# Altium PCB HM-13 - 副本.PcbDoc
Units mil, origin at the board's own origin, x right, y up, seen from the top; angles counter-clockwise.
Board outline 6000 x 4000 mil, 2 copper layers (Top Layer, Bottom Layer); 12 components, 8 nets, 41 pads, 26 vias.
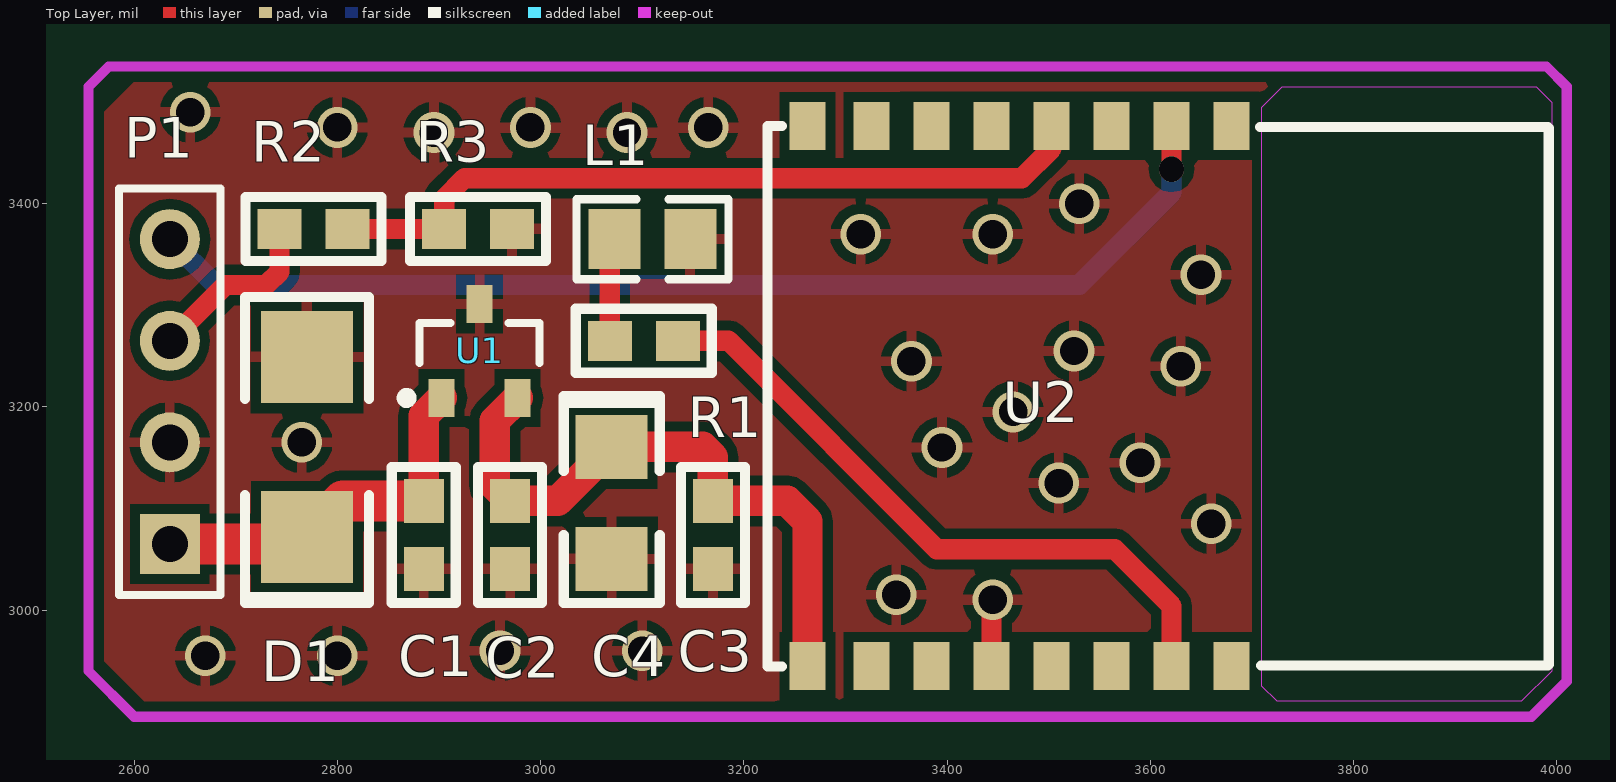
[diagram p0: Top Layer view]
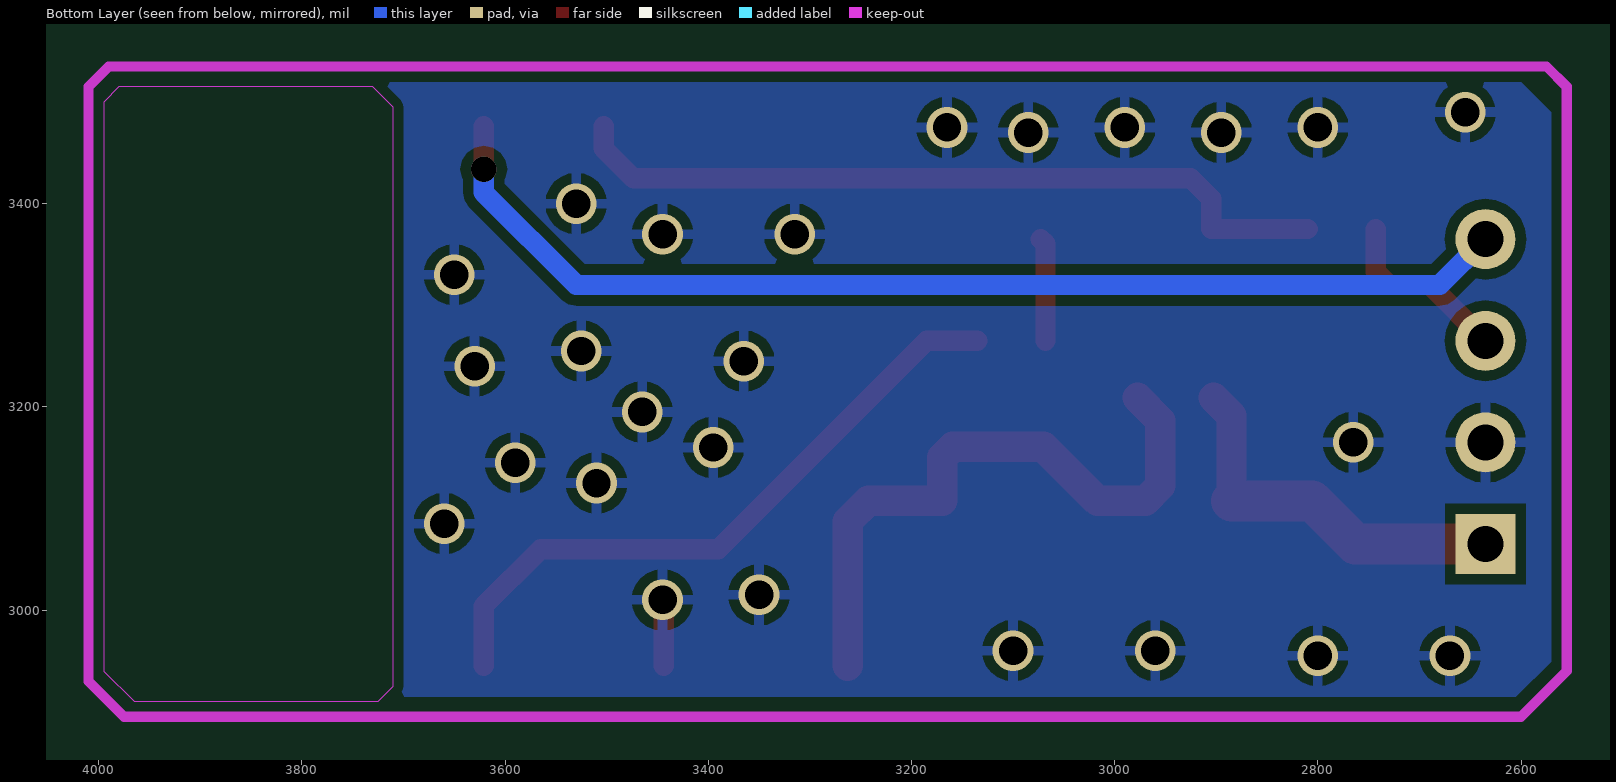
[diagram p1: Bottom Layer view, seen from below]

## Layer stack, top to bottom
Top Solder: solder mask 0.4, Solder Resist, Dk 3.5
Top Layer: signal copper 1.4
Dielectric 1: dielectric 12.6, FR-4, Dk 4.8
Bottom Layer: signal copper 1.4
Bottom Solder: solder mask 0.4, Solder Resist, Dk 3.5

## Board outline
1000,1000 7000,1000 7000,5000 1000,5000

## Design rules (kind name [scope] priority, off if disabled: settings)
Clearance [All] p1: gap=10
PolygonConnect [All] p1: connectstyle=Relief reliefconductorwidth=10 reliefentries=4 polygonreliefangle="90 Angle" airgapwidth=10
RoutingVias [All] p1: holewidth=28 width=40 viastyle="Through Hole" minholewidth=25 minwidth=15 maxholewidth=28 maxwidth=40
SolderMaskExpansion [All] p1: expansion=4
Width [All] p1: maxlimit=40 minlimit=10 preferedwidth=20
30 further rules are at their usual default settings.

## Components (designator, comment, footprint, x,y, rotation, side; value= is the part's Value field where it differs from the comment)
C1 "1uF" 0603 2885.39,3073.9 r90 top
C2 "1uF" 0603 2970.39,3073.9 r90 top
C3 "0.1uF" 0603 3170,3073.9 r90 top
C4 "10uF/16V" 1206 3070,3105 r270 top
D1 "TVS" DO214-AC 2770,3160.51 r270 top
L1 "LED" 0805 3110,3365 r0 top
P1 "Header 4" HDR1X4 2635,3065 r90 top
R1 "470" 0603 3101.54,3265.39 r180 top
R2 "2.2K" 0603 2776.54,3375.39 r180 top
R3 "4.7K" 0603 2938.46,3375.39 r180 top
U1 "AP7313" AP7313-33SAG-7 2940,3255 r90 top
U2 "HM-13" HM-13 3223.31,3476.5 r270 top

## Footprints (in the part's own frame and the unit in brackets; to place one, negate y for a bottom-side part, rotate by r counter-clockwise, add the part's x,y. Pads: shape width x height; smd on the part's side, far side on the other; paste and mask are expansions set on the pad)
0603 [mm]
  rect 1.1x1 smd: 1(-0.85,0.01) 2(0.85,0.01)
  silkscreen extent -1.7,-0.79 1.7,0.81
0805 [mm]
  rect 1.3x1.5 smd: 1(-0.95,0) 2(0.95,0)
  silkscreen extent -1.9,-1 1.9,1
1206 [mm]
  rect 1.6x1.8 smd: 1(-1.41,0) 2(1.39,0)
  silkscreen extent -2.68,-1.2 2.49,1.2
AP7313-33SAG-7 [mm] "SOT23, 3-Leads, Body 2.90x2.40mm, Pitch 0.95mm, IPC Medium Density"
  rect 0.95x0.65 smd: 1(-1.175,0.95) 2(-1.175,-0.95) 3(1.175,0)
  silkscreen extent -1.3,-1.5 0.7,1.95
DO214-AC [mm]
  rect 2.3x2.3 smd: 1(-2.25,0) 2(2.25,0)
  silkscreen extent -3.75,-1.55 3.9,1.55
HDR1X4 [mm] "Connector; Header; 4 Position"
  rect 1.5x1.5 hole 0.9: 1(0,0)
  round 1.5 hole 0.9: 2(2.54,0) 3(5.08,0) 4(7.62,0)
  silkscreen extent -1.27,-1.27 8.89,1.27
HM-13 [mm]
  rect 1.2x0.9 smd: 1(0,11.6) 2(0,10.1) 3(0,8.6) 4(0,7.1) 5(0,5.6) 6(0,4.1) 7(0,2.6) 8(0,1) 9(13.5,1) 10(13.5,2.6) 11(13.5,4.1) 12(13.5,5.6) 13(13.5,7.1) 14(13.5,8.6) 15(13.5,10.1) 16(13.5,11.6)
  silkscreen extent 0,0 13.51,19.53

## Part data
C1 C2 C3: library part Cap1, "ceramic"
C4: library part Cap3, "aluminum"
D1: library part 6V8A-TVS
P1: "Header, 4-Pin"
R1 R2 R3: library part Res
U1: library part AP7313-33SAG-7

## Via types
v1: diameter 40, hole 28, Top Layer to Bottom Layer, 25 vias
v2: diameter 25, hole 25, Top Layer to Bottom Layer, 1 vias

## Nets (pads, with @x,y where several pads share a name; then routed paths per layer and width w, separated by ;. In a path a pad name is that pad's centre, name@x,y a point inside that pad or via, vN(x,y) a via of type N, cw(c..) or ccw(c..) an arc to the next point about the centre after c; other vN are vias at no path point)
3.3V: C2.2 C3.2 C4.1 U1.2 U2.9 | length 629.4
  Top Layer w30: U1.2 2955,3186.34 2955,3122.36 C2.2 3016.85,3107.36 C4.1 3159.49,3160.51 3169.61,3150.39 C3.2 3242.64,3107.36 3262.68,3087.32 U2.9
5V: C1.2 D1.2 P1.1 U1.1 | length 376.2
  Top Layer w30: C1.2 2885,3191.14 U1.1
  Top Layer w40: P1.1 2763.07,3065 D1.2 2805.43,3107.36 C1.2
GND: C1.1 C2.1 C3.1 C4.2 D1.1 L1.2 P1.2 R3.1 U1.3 U2.12 | length 65.5
  Top Layer w20: U2.12 3443.78,3008.78 v1(3445,3010)
  other v1: 2670,2955 2800,2955 2960,2960 3100,2960 3350,3015 3660,3085 3510,3125 3590,3145 3395,3160 2765,3165 3465,3195 3630,3240 3365,3245 3525,3255 3650,3330 3315,3370 3445,3370 3530,3400 2895,3470 3085,3470 2800,3475 2990,3475 3165,3475 2655,3490
NetL1_1: L1.1 R1.2 | length 101.9
  Top Layer w20: R1.2 3068.07,3360.47 L1.1
NetR1_1: R1.1 U2.15 | length 653.1
  Top Layer w20: R1.1 3185,3265 3390,3060 3565,3060 3620.94,3004.06 U2.15
NetR2_1: R2.1 R3.2 U2.4 | length 765.5
  Top Layer w20: R2.1 R3.2 2905,3405 2925,3425 3473.62,3425 3502.83,3454.21 U2.4
RX: P1.3 R2.2 | length 178.2
  Top Layer w20: P1.3 2690,3320 2730,3320 2743.07,3333.07 R2.2
TX: P1.4 U2.2 | length 1107.8
  Top Layer w20: v2(3620.94,3434.06) U2.2
  Bottom Layer w20: P1.4 2680,3320 3530,3320 3620.94,3410.94 v2(3620.94,3434.06)
pads on no net: U2.1 U2.3 U2.5 U2.6 U2.7 U2.8 U2.10 U2.11 U2.13 U2.14 U2.16

## Polygon pours and split planes (outlines as drawn)
GND on Bottom Layer "GND" (solid, pour order 0): 2565,3489.61 2570,3489.61 2600,3519.61 3975,3519.61 3990,3504.61 3990,2944.61 3960,2914.61 3720,2914.61 2605,2914.61 2565,2954.61
GND on Top Layer "GND" (solid, pour order 2): 2570,3490 2600,3520 3975,3520 3980,3515 3995,3500 3995,2940 3970,2915 3965,2915 3965,2910 3725,2910 2610,2910 2605,2915 2570,2950

## Keep-outs
Keep-Out Layer:
  region: 3730,3515 3980,3515 3995,3500 3995,2940 3965,2910 3725,2910 3710,2925 3710,3495
  lines w10: 4010,2950 4010,3515 3990,3535 2575,3535 2555,3515 2555,2940 2600,2895 3975,2895 4010,2930 4010,2960